# Altium PCB MAGI'sCore-NOL.PcbDoc
Units mil, origin at the board's own origin, x right, y up, seen from the top; angles counter-clockwise.
Board outline 6000 x 4000 mil, 2 copper layers (Top Layer, Bottom Layer); 18 components, 33 nets, 134 pads, 24 vias.
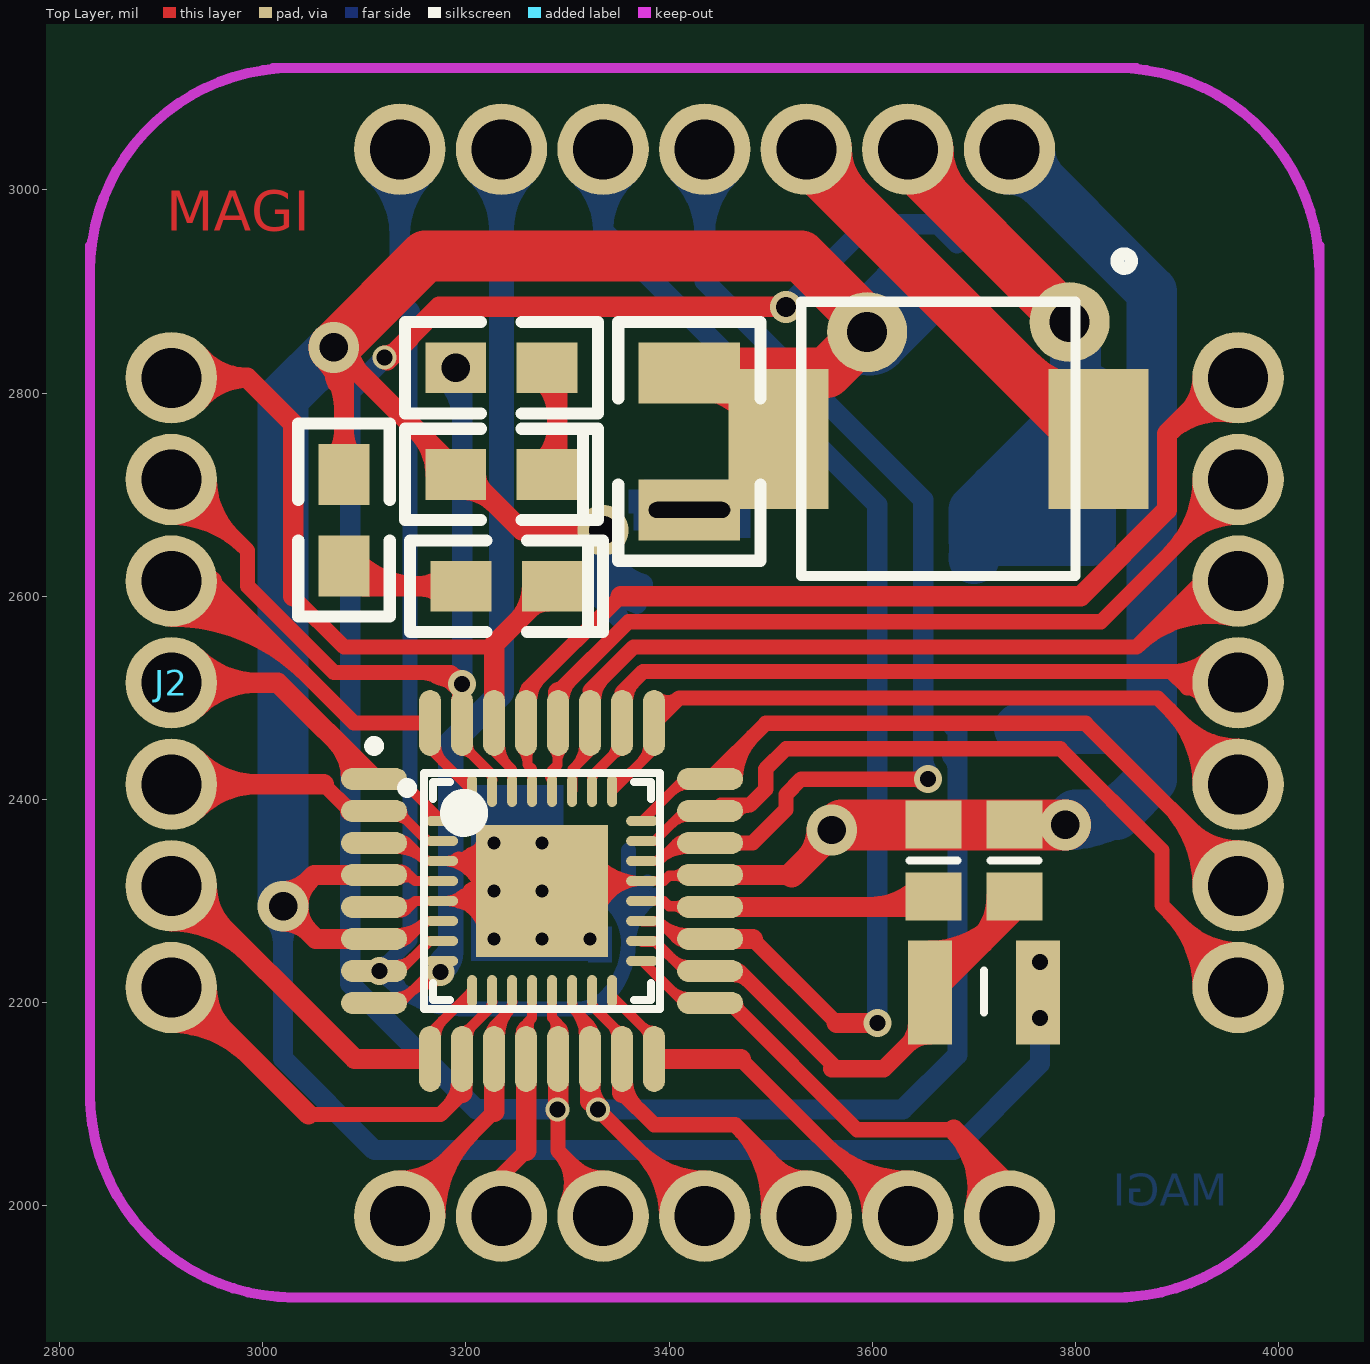
[diagram p0: Top Layer view]
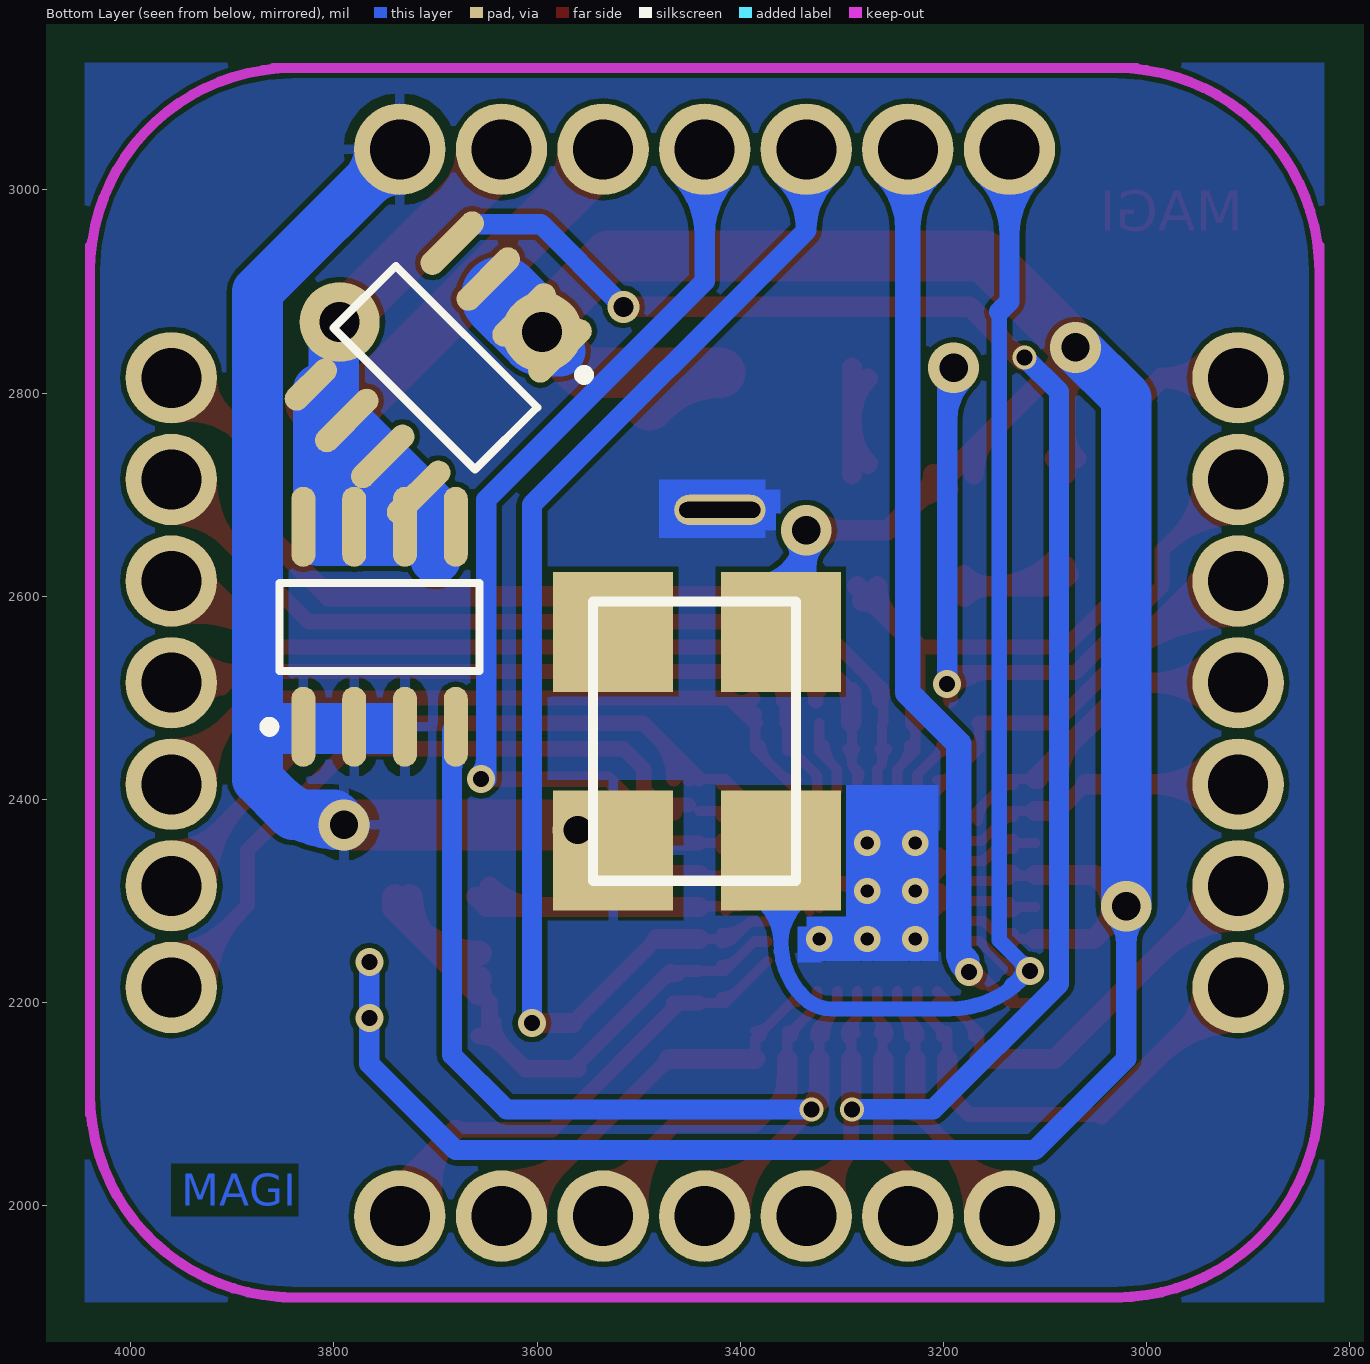
[diagram p1: Bottom Layer view, seen from below]

## Layer stack, top to bottom
Top Layer: signal copper 1.4
Dielectric: dielectric 12.6, FR-4, Dk 4.8
Bottom Layer: signal copper 1.4

## Board outline
1000,1000 7000,1000 7000,5000 1000,5000

## Design rules (kind name [scope] priority, off if disabled: settings)
Clearance [All] p1: gap=5
ComponentClearance [All] p1: gap=0 collisioncheckmode=3 verticalgap=0 showdistances=FALSE
PolygonConnect [All] p1: connectstyle=Relief reliefconductorwidth=10 reliefentries=4 polygonreliefangle="90 Angle" airgapwidth=10
RoutingVias [All] p1: holewidth=28 width=50 viastyle="Through Hole" minholewidth=28 minwidth=50 maxholewidth=28 maxwidth=50
SilkToSilkClearance [All] p1: silktosilkclearance=0
SolderMaskExpansion [All] p1: expansion=4
Width [All] p1: maxlimit=100 minlimit=10 preferedwidth=10
26 further rules are at their usual default settings.

## Components (designator, comment, footprint, x,y, rotation, side; value= is the part's Value field where it differs from the comment)
C1 "CAP_1" 1210 3420,2685 r90 top
C2 "CAP_1" 6-0805_N 3740,2340 r270 top
C3 "CAP_1" 6-0805_N 3660,2340 r270 top
J1 "CON7" CON7 3960,2215 r90 top
J2 "CON7" CON7 2910,2815 r270 top
J3 "CON7" CON7 3735,3040 r180 top
J4 "CON7" CON7 3135,1990 r0 top
L1 "INDUCTOR" 22uh 3665,2755 r0 top
L2 "INDUCTOR" 14-1210 3710,2210 r0 top
LED1 "LED_3" 0805 3195,2610 r0 top
LED2 "LED_3" 0805 3280,2825 r180 top
OSC1 "Oscillator" Oscillator 3420,2445 r270 bottom
Q1 "SI9424DY" SO-8_N#1 3700,2825 r315 bottom
Q2 "SI9426DY" SO-8_N#2 3755,2570 r90 bottom
R1 "RES1_1" 0805 3080,2630 r90 top
R2 "RES1_1" 0805 3280,2720 r180 top
U1 "ATmega8A-AU" 32A_N 3275,2310 r0 top
U2 "ATmega8A-MU" 32M1-A_N 3275,2310 r0 top

## Footprints (in the part's own frame and the unit in brackets; to place one, negate y for a bottom-side part, rotate by r counter-clockwise, add the part's x,y. Pads: shape width x height; smd on the part's side, far side on the other; paste and mask are expansions set on the pad)
6-0805_N [mm] "Chip Resistor, Body 2.0x1.2mm, IPC Medium Density"
  rect 1.2x1.4 smd: 1(-0.9,0) 2(0.9,0)
  silkscreen extent 0,-0.6 0,0.6, body extent -1.07,-0.7 1.07,0.7, height 0.7
14-1210 [mm] "Chip Resistor, Body 3.2x2.5mm, IPC High Density"
  rect 1.1x2.6 smd: 1(-1.35,0) 2(1.35,0)
  silkscreen extent 0,-0.5 0,0.55, body extent -1.68,-1.32 1.68,1.32, height 0.9
22uh [mm]
  rect 2.5x3.5 smd: 1(-4,0) 2(4,0)
  silkscreen extent -3.43,-3.43 3.43,3.43
32A_N [mm] "32-Pin Thin Quad Flat Pack 0.8 mm Pitch, IPC Medium Density"
  oval 1.65x0.55 smd: 1(-4.2,2.8) 2(-4.2,2) 3(-4.2,1.2) 4(-4.2,0.4) 5(-4.2,-0.4) 6(-4.2,-1.2) 7(-4.2,-2) 8(-4.2,-2.8) 17(4.2,-2.8) 18(4.2,-2) 19(4.2,-1.2) 20(4.2,-0.4) 21(4.2,0.4) 22(4.2,1.2) 23(4.2,2) 24(4.2,2.8)
  oval 0.55x1.65 smd: 9(-2.8,-4.2) 10(-2,-4.2) 11(-1.2,-4.2) 12(-0.4,-4.2) 13(0.4,-4.2) 14(1.2,-4.2) 15(2,-4.2) 16(2.8,-4.2) 25(2.8,4.2) 26(2,4.2) 27(1.2,4.2) 28(0.4,4.2) 29(-0.4,4.2) 30(-1.2,4.2) 31(-2,4.2) 32(-2.8,4.2)
  silkscreen extent -4.32,-2.95 2.95,3.75, body extent -3.5,-3.5 3.5,3.5, height 1.2
32M1-A_N [mm] "QFN, 32-Leads, Body 5x5mm, Pitch 0.5mm, IPC Medium Density"
  oval 0.8x0.25 smd: 1(-2.5,1.75) 2(-2.5,1.25) 3(-2.5,0.75) 4(-2.5,0.25) 5(-2.5,-0.25) 6(-2.5,-0.75) 7(-2.5,-1.25) 8(-2.5,-1.75) 17(2.5,-1.75) 18(2.5,-1.25) 19(2.5,-0.75) 20(2.5,-0.25) 21(2.5,0.25) 22(2.5,0.75) 23(2.5,1.25) 24(2.5,1.75)
  oval 0.25x0.8 smd: 9(-1.75,-2.5) 10(-1.25,-2.5) 11(-0.75,-2.5) 12(-0.25,-2.5) 13(0.25,-2.5) 14(0.75,-2.5) 15(1.25,-2.5) 16(1.75,-2.5) 25(1.75,2.5) 26(1.25,2.5) 27(0.75,2.5) 28(0.25,2.5) 29(-0.25,2.5) 30(-0.75,2.5) 31(-1.25,2.5) 32(-1.75,2.5)
  rect 3.3x3.3 smd: 33(0,0)
  silkscreen extent -3.5,-2.73 2.73,2.73, body extent -2.58,-2.58 2.58,2.58, height 1
0805 [mil]
  rect 60x50 smd: 1(0,0) 2(90,0)
  silkscreen extent -50,-45 140,45
1210 [mil]
  rect 60x100 smd: 1(0,0) 2(135,0)
  silkscreen extent -50,-70 185,70
CON7 [mil]
  round 90 hole 59.06: 1(0,0) 2(100,0) 3(200,0) 4(300,0) 5(400,0) 6(500,0) 7(600,0)
Oscillator [mil] "7mm*5mm"
  rect 118.11x118.11 smd: 1(-120,-105) 2(95,-105) 3(95,60) 4(-120,60)
  silkscreen extent -150,-125 125,75
SO-8_N#1 [mm] "SOIC, 8-Leads, Body 4.9x3.9mm, Pitch 1.27mm, IPC Medium Density"
  oval 2x0.6 smd: 1(-2.5,1.905) 2(-2.5,0.635) 3(-2.5,-0.635) 4(-2.5,-1.905) 6(2.5,-0.635) 7(2.5,0.635) 8(2.5,1.905)
  oval 1.6x0.6 smd: 5(2.5,-1.905)
  silkscreen extent -2.62,-2.5 1.1,2.88, body extent -2,-2.5 2,2.5, height 1.75
SO-8_N#2 [mm] "SOIC, 8-Leads, Body 4.9x3.9mm, Pitch 1.27mm, IPC Medium Density"
  oval 2x0.6 smd: 1(-2.5,1.905) 2(-2.5,0.635) 3(-2.5,-0.635) 4(-2.5,-1.905) 5(2.5,-1.905) 6(2.5,-0.635) 7(2.5,0.635) 8(2.5,1.905)
  silkscreen extent -2.62,-2.5 1.1,2.88, body extent -2,-2.5 2,2.5, height 1.75

## Part data
C1 C2 C3: "Capacitor"
J1 J2 J3 J4: "Connector"
Q1: "P-Channel 2.5V (G-S)  MOSFET"
Q2: "N-Channel 2.5V (G-S) Rated  MOSFET"
U1: "8-bit AVR Microcontroller, 8KB Flash, 512 Bytes EEPROM, 1KB SRAM, 32-pin TQFP, Industrial Grade (-40癈 to 85癈)"
U2: "8-bit AVR Microcontroller, 8KB Flash, 512 Bytes EEPROM, 1KB SRAM, 33-pin MLF, Industrial Grade (-40癈 to 85癈)"

## Free pads (board coordinates)
  round 78.74 hole 39.37: 0(3794.19,2870) 1(3595,2860)
  oval 90x30 hole 15.75 slot 80 at 0 deg: 1(3420,2685)

## Via types
v1: diameter 25.98, hole 12.99, Top Layer to Bottom Layer, tented top, 7 vias
v2: diameter 27.56, hole 15.75, Top Layer to Bottom Layer, 7 vias
v3: diameter 50, hole 28, Top Layer to Bottom Layer, 6 vias
v4: diameter 23.62, hole 15.75, Top Layer to Bottom Layer, 3 vias
v5: diameter 31.5, hole 19.68, Top Layer to Bottom Layer, 1 vias

## Nets (pads, with @x,y where several pads share a name; then routed paths per layer and width w, separated by ;. In a path a pad name is that pad's centre, name@x,y a point inside that pad or via, vN(x,y) a via of type N, cw(c..) or ccw(c..) an arc to the next point about the centre after c; other vN are vias at no path point)
ADC6: J3.5 U1.19 U2.19 | length 1437.8
  Top Layer w10: U2.19 3373.9,2280 3390,2280 ; U2.19@3384.25,2280.55 cw(c3384.25,2268.01) 3393.12,2276.88 ; 3406.49,2263.51 ccw(c3418.39,2275.4) U1.19@3418.8,2258.58 ; U1.19@3413.99,2259.32 ccw(c3407.24,2254.41) 3407.24,2262.76 ; U1.19@3413.99,2266.19 cw(c3407.24,2271.1) 3407.24,2262.76 ; U1.19@3418.56,2268.58 cw(c3417.6,2307.59) 3390,2280 ; U1.19 3407.24,2262.76 ; 3390,2280 3407.24,2262.76
  Top Layer w15: 3482.24,2262.76 3565,2180
  Top Layer w20: U1.19 3482.24,2262.76 ; 3565,2180 v2(3605,2180)
  Bottom Layer w20: J3.5@3311.25,3014.29 cw(c3261.08,2960) 3335,2960 ; J3.5 3335,2960 ; J3.5@3358.75,3014.29 ccw(c3408.92,2960) 3335,2960 ; v2(3605,2180) 3605,2690 3335,2960
ADC7: J3.4 U1.22 U2.22 | length 1325.8
  Top Layer w10: U2.22 3389.53,2339.53 ; U2.22@3384.25,2339.45 ccw(c3384.25,2352) 3393.13,2343.13 ; 3406.36,2356.36 cw(c3418.57,2344.15) U1.22@3418.74,2361.42 ; U1.22@3413.99,2353.81 ccw(c3407.24,2348.9) 3407.24,2357.24 ; U1.22@3413.99,2360.68 cw(c3407.24,2365.59) 3407.24,2357.24 ; U1.22@3418.64,2351.42 ccw(c3418.23,2310.82) 3389.53,2339.53 ; U1.22 3407.24,2357.24 ; 3389.53,2339.53 3407.24,2357.24
  Top Layer w15: U1.22 3482.24,2357.24 3515,2390 3515,2405 3530,2420 v2(3655,2420) ; 3639.84,2420 cw(c3639.84,2404.84) 3650.56,2415.56 ccw(c3639.84,2404.84) 3639.84,2420 ; 3639.84,2420 ccw(c3639.84,2435.16) 3650.56,2424.44 cw(c3639.84,2435.16) 3639.84,2420
  Bottom Layer w20: J3.4@3410.25,3015.25 cw(c3350.5,2955.5) 3435,2955.5 cw(c3519.5,2955.5) J3.4@3459.75,3015.25 ; J3.4 3435,2910 3650,2695 v2@3650,2420 ; 3650,2441.2 ccw(c3676.2,2441.2) 3657.67,2422.67 cw(c3676.2,2441.2) 3650,2441.2
GND: C1.1 C2.1 C3.1 J3.1 OSC1.2 pad.1@3420,2685 Q2.1 Q2.2 Q2.3 U1.3 U1.5 U1.21 U2.3 U2.5 U2.21 U2.33 | length 4473.8
  Top Layer w10: U1.5 3144.25,2294.25 ; U1.3 3142.76,2357.24 ; U1.5@3128.84,2290.88 ccw(c3134.77,2299.02) 3141.9,2291.9 ; U1.3@3131.26,2361.42 cw(c3131.43,2344.15) 3143.64,2356.36 ; U1.3@3131.36,2351.42 cw(c3131.77,2310.82) 3160.47,2339.53 ; U1.5@3134.73,2298.96 ccw(c3141.75,2308.57) 3150.16,2300.16 ; U1.5@3135.66,2290.39 cw(c3144.25,2282.77) 3144.25,2294.25 ; U1.5@3135.66,2298.12 ccw(c3144.25,2305.73) 3144.25,2294.25 ; U1.3@3136.01,2353.81 cw(c3142.76,2348.9) 3142.76,2357.24 ; U1.3@3136.01,2360.68 ccw(c3142.76,2365.59) 3142.76,2357.24 ; 3156.87,2343.13 ccw(c3165.75,2352) U2.3@3165.75,2339.45 ; U2.3@3187.33,2339.57 cw(c3195.45,2334.88) 3193.03,2343.94 ; U2.3@3187.58,2339.53 cw(c3187.58,2301.67) U2.33@3225.26,2305.26 ; U2.5@3190.68,2300.16 ccw(c3190.68,2339.55) U2.33@3227.85,2326.52 ; 3194.01,2304.79 cw(c3207.8,2288.39) U2.33@3222.33,2304.13 ; 3195.87,2302.66 cw(c3210.23,2272.83) U2.33@3224.35,2302.77 ; 3196.22,2300.16 cw(c3196.22,2252.7) U2.33@3234.6,2280.62 ; 3198.57,2339.53 cw(c3198.57,2302.72) U2.33@3235.22,2306.21 ; 3200.12,2345.23 cw(c3216.79,2324.16) U2.33@3225.24,2349.66 ; 3201.53,2339.53 ccw(c3201.53,2383.47) U2.33@3232.6,2352.4 ; 3202.25,2304.19 cw(c3212.12,2287.09) U2.33@3223.25,2303.4 ; 3202.36,2294.5 cw(c3171.81,2257.18) U2.33@3219.8,2261.96 ; 3202.7,2312.09 cw(c3215.56,2296.79) U2.33@3229.12,2311.48 ; 3204.78,2300.16 ccw(c3204.78,2334.61) U2.33@3237.29,2323.22 ; 3208.41,2322.83 ccw(c3229.94,2330.86) U2.33@3227.55,2308 ; 3208.7,2301.73 ccw(c3200.76,2321.58) U2.33@3220.41,2313.15 ; 3209.57,2339.53 cw(c3209.57,2303.77) U2.33@3245.17,2307.16 ; 3209.59,2339.12 ccw(c3199.42,2356.74) U2.33@3219.77,2357.1 ; U2.33@3211.39,2319.39 cw(c3223.32,2305.2) U2.33@3235.9,2318.82 ; U2.33@3211.44,2302.82 cw(c3217.82,2286.84) U2.33@3224.61,2302.66 ; U2.33@3212.37,2342.6 ccw(c3200.26,2357.9) U2.33@3219.77,2357.44 ; U2.33@3214.04,2307.71 ccw(c3228.06,2312.94) U2.33@3226.51,2298.06 ; U2.33@3214.66,2356.73 cw(c3223.77,2345.22) U2.33@3228.39,2359.15 ; U2.33@3214.77,2311.76 cw(c3221.75,2297.27) U2.33@3228.61,2311.82 ; U2.33@3215.32,2300.58 ccw(c3210.79,2308.41) U2.33@3219.8,2309.26 ; U2.33@3215.31,2304.31 ccw(c3176.58,2300.62) U2.3 ; U2.33@3216.07,2301.02 cw(c3222.41,2290.04) U2.33@3225.69,2302.28 ; U2.33@3216.81,2327.94 ccw(c3231.58,2333.45) U2.33@3229.04,2317.89 ; U2.33@3217.5,2346.66 cw(c3225.36,2336.72) U2.33@3226.83,2349.31 ; U2.33@3218.41,2329.83 cw(c3176.58,2344.49) U2.5 cw(c3176.58,2238.42) U2.33@3226.51,2274.73 ; U2.33@3219.81,2335.62 cw(c3206.69,2315.72) U2.33@3229.69,2309.47 ; U2.33@3221.04,2279.21 cw(c3205.78,2260.57) U2.33@3229.75,2262.96 ; U2.33@3226.54,2321.95 cw(c3228.23,2305.38) U2.33@3244.05,2310.58 ; U2.33@3227.58,2317.99 ccw(c3227.31,2330.11) 3237.49,2323.53 ccw(c3250.04,2315.42) U2.33@3235.52,2311.89 ; U2.33@3231.34,2328.02 cw(c3220.73,2311.91) U2.33@3239.34,2306.85 ; U2.33@3232.83,2303.82 cw(c3241.09,2293.76) U2.33@3248.75,2304.3 ; U2.33@3249.5,2304.19 cw(c3259.37,2287.09) U2.33@3270.49,2303.4 ; U2.33@3262.56,2300.58 ccw(c3258.04,2308.41) U2.33@3267.04,2309.26 ; U2.33@3263.32,2301.02 cw(c3269.65,2290.04) U2.33@3272.93,2302.28 ; U2.33@3277.07,2317.72 ccw(c3280.35,2329.96) U2.33@3286.68,2318.99 ; U2.33@3279.51,2316.6 ccw(c3290.63,2332.91) U2.33@3300.5,2315.81 ; U2.33@3282.96,2310.75 cw(c3291.96,2311.59) U2.33@3287.44,2319.42 ; U2.33@3312.71,2296.79 cw(c3345.22,2285.4) 3345.22,2319.84 ; U2.33@3315.4,2339.39 ccw(c3353.78,2367.3) 3353.78,2319.84 ; U2.33@3322.15,2293.48 cw(c3359.32,2280.46) U2.21@3359.32,2319.84 ; U2.33@3323.49,2345.27 ccw(c3373.42,2381.58) U2.21 ccw(c3373.42,2275.51) U2.33@3331.59,2290.17 ; 3402.83,2325 ccw(c3402.83,2341.62) U1.21@3414.58,2329.87 ; 3406.44,2325 cw(c3406.44,2313.49) U1.21@3414.58,2321.63 ; U1.21 3439.61,2325 3400,2325 3394.84,2319.84 U2.21 U2.33@3284.84,2319.84 ; 3142.76,2357.24 3160.47,2339.53 ; 3144.25,2294.25 3150.16,2300.16 ; 3150.16,2300.16 U2.5 U2.33@3265.16,2300.16 ; 3160.47,2339.53 U2.3 3245.47,2339.53 v1(3275,2310) ; U2.3 ccw(c3176.58,2395.33) 3221.34,2362.02 cw(c3176.58,2395.33) U2.3 ; U2.33@3261.36,2323.64 cw(c3247.71,2310) 3267.01,2310 ccw(c3247.71,2310) U2.33@3261.36,2323.64 ; U2.33@3261.36,2323.64 ccw(c3275,2337.29) 3275,2317.99 cw(c3275,2337.29) U2.33@3261.36,2323.64 ; U2.33@3265.16,2300.16 cw(c3270.9,2294.41) 3272.97,2302.27 ccw(c3270.9,2294.41) U2.33@3265.16,2300.16 ; U2.33@3265.16,2300.16 ccw(c3259.41,2305.9) 3267.27,2307.97 cw(c3259.41,2305.9) U2.33@3265.16,2300.16 ; U2.33@3265.16,2300.16 cw(c3265.16,2340.3) 3233.97,2315.03 ccw(c3265.16,2340.3) U2.33@3265.16,2300.16 ; U2.33@3265.16,2300.16 v1(3275,2310) ; v1(3275,2310) U2.33@3284.84,2319.84 ; U2.33@3284.84,2319.84 cw(c3279.1,2325.59) 3277.03,2317.73 ccw(c3279.1,2325.59) U2.33@3284.84,2319.84 ; U2.33@3284.84,2319.84 ccw(c3290.59,2314.1) 3282.73,2312.03 cw(c3290.59,2314.1) U2.33@3284.84,2319.84 ; U2.5@3184.7,2300.16 ccw(c3184.7,2353.06) 3222.1,2315.65 cw(c3184.7,2353.06) U2.5@3184.7,2300.16 ; 3196.48,2339.53 ccw(c3196.48,2380.52) 3229.37,2356.05 cw(c3196.48,2380.52) 3196.48,2339.53 ; 3208.84,2300.16 ccw(c3208.84,2328.92) 3229.18,2308.58 cw(c3208.84,2328.92) 3208.84,2300.16 ; U2.33@3216.39,2339.53 ccw(c3216.39,2365.7) 3237.39,2350.08 cw(c3216.39,2365.7) U2.33@3216.39,2339.53 ; U2.33@3226.2,2308.74 ccw(c3244.19,2323.31) 3244.19,2300.16 cw(c3244.19,2323.31) U2.33@3226.2,2308.74 ; U2.33@3231.94,2300.16 ccw(c3231.94,2353.06) 3269.35,2315.65 cw(c3231.94,2353.06) U2.33@3231.94,2300.16 ; U2.33@3256.09,2300.16 ccw(c3256.09,2328.92) 3276.42,2308.58 cw(c3256.09,2328.92) U2.33@3256.09,2300.16 ; U2.33@3273.58,2311.42 cw(c3293.91,2291.09) 3293.91,2319.84 ccw(c3293.91,2291.09) U2.33@3273.58,2311.42 ; U2.33@3280.65,2304.35 cw(c3318.06,2266.94) 3318.06,2319.84 ccw(c3318.06,2266.94) U2.33@3280.65,2304.35
  Top Layer w20: U1.21 3520.75,2325.75
  Top Layer w25: 3520.75,2325.75 v3@3565,2370 ; 3535.13,2340.13 ccw(c3505.25,2370) 3547.5,2370 cw(c3505.25,2370) 3535.13,2340.13
  Top Layer w30: v3@3565,2370 v3@3570,2375
  Top Layer w50: v3@3570,2375 v3(3790,2375)
  Bottom Layer w50: J3.1@3735,3020 cw(c3735,2971.72) 3769.14,3005.86 cw(c3803.28,3040) J3.1@3755,3040 ; J3.1 3875,2900 3875,2470 ; 3745,2470 3875,2470 ; v3(3790,2375) ccw(c3790,2471.57) 3858.28,2403.28 cw(c3790,2471.57) v3(3790,2375) ; v3(3790,2375) 3800,2385 3840,2385 3875,2420 3875,2470
  other v1: 3227.76,2262.76 3275,2262.76 3322.24,2262.76 3227.76,2310 3227.76,2357.25 3275,2357.25
  other v3: 3560,2370
MISO: J4.6 U1.16 U2.16 | length 633.8
  Top Layer w10: U2.16@3343.9,2200.83 cw(c3343.9,2188.09) 3352.9,2197.1 ; U2.16 3343.9,2206.1 3385.24,2164.76 U1.16 ; 3372.67,2177.33 ccw(c3385.24,2189.9) U1.16@3385.24,2172.13 ; 3376.38,2173.62 cw(c3369.05,2166.3) U1.16@3379.41,2166.3
  Top Layer w15: 3470.35,2144.65 J4.6@3625,1990 ; 3553.91,2061.09 ccw(c3635,2142.18) J4.6@3635,2027.5 ; 3578.05,2036.95 cw(c3531.11,1990) J4.6@3597.5,1990 ; 3579.52,2035.48 ccw(c3635,2090.96) J4.6@3635,2012.5
  Top Layer w20: U1.16 3470.35,2144.65 ; J4.6@3625,1990 J4.6
MOSI: J4.5 U1.15 U2.15 | length 661.7
  Top Layer w10: U2.15@3324.13,2200.75 ccw(c3332.99,2200.75) 3326.73,2194.48 ; U2.15 3324.21,2197 3353.74,2167.47 U1.15 ; 3342.96,2178.25 cw(c3331.01,2166.3) U1.15@3347.91,2166.3 ; 3345.8,2175.42 ccw(c3353.74,2183.36) U1.15@3353.74,2172.13
  Top Layer w15: 3353.74,2111.26 3385,2080 3465,2080 ; U1.15@3357.07,2122.99 ccw(c3393.42,2122.99) 3367.72,2097.28 ; 3488.24,2056.76 cw(c3429.02,1997.54) J4.5@3512.56,1991.6 ; J4.5@3497.59,1992.66 ccw(c3385.64,2000.63) 3465,2080 ; 3505.13,2039.87 ccw(c3535,2069.75) J4.5@3535,2027.5 ; 3511.47,2033.52 cw(c3472.41,1994.45) J4.5@3527.52,1990.53 ; J4.5@3535,2010 3465,2080
  Top Layer w20: 3353.74,2111.26 U1.15 ; J4.5 J4.5@3535,2010
NetC2_2: C2.2 L2.1 U1.18 U2.18 | length 765
  Top Layer w10: U2.18@3373.43,2260 U2.18@3386.46,2260 ; U2.18 3385.67,2260.79 U2.18@3386.46,2260 ; 3402.77,2243.68 ccw(c3418.7,2259.61) U1.18@3418.7,2237.09 ; U1.18 3415.2,2231.26 U2.18@3386.46,2260
  Top Layer w12: U1.18 U1.18@3468.74,2231.26
  Top Layer w15: U1.18@3462.01,2227.93 cw(c3462.01,2203.65) 3479.18,2220.82 ; U1.18@3468.74,2231.26 3560,2140 3560,2135
  Top Layer w17: 3560,2135 3611.38,2135 3646.85,2170.47 3646.85,2200 L2.1 ; L2.1@3643.7,2180.47 cw(c3611.94,2180.47) 3634.4,2158.02 cw(c3656.85,2135.56) L2.1@3656.85,2167.32
  Top Layer w25: L2.1 3740,2293.15 C2.2 ; L2.1@3656.85,2223.68 ccw(c3656.85,2256.71) 3680.21,2233.36 ; L2.1@3656.85,2248.68 ccw(c3656.85,2342.07) 3722.88,2276.03 ; 3706.22,2259.37 ccw(c3661.02,2304.57) C2.2@3724.94,2304.57
NetC3_2: C3.2 U1.20 U2.20 | length 368.9
  Top Layer w10: U2.20 3394.84,2300.16 3400,2295 3439.61,2295 U1.20 ; 3402.83,2295 cw(c3402.83,2278.38) U1.20@3414.58,2290.13 ; 3406.44,2295 ccw(c3406.44,2306.51) U1.20@3414.58,2298.37
  Top Layer w20: U1.20 3649.69,2294.25 C3.2 ; 3598.27,2294.25 ccw(c3598.27,2362.36) C3.2@3646.43,2314.2
NetJ1_1: J1.1 U1.23 U2.23 | length 1017.7
  Top Layer w10: U2.23 3385.67,2359.21 3415.2,2388.74 U1.23 ; 3402.77,2376.31 cw(c3418.7,2360.38) U1.23@3418.7,2382.91
  Top Layer w15: U1.23@3451.02,2394.57 3479.57,2394.57 ; U1.23@3464.73,2386.84 cw(c3479.57,2376.48) 3479.57,2394.57 ; 3891.78,2289.17 cw(c3817.61,2215) J1.1@3922.5,2215 ; 3906.13,2274.81 ccw(c3960,2328.68) J1.1@3960,2252.5 ; 3917.39,2263.56 cw(c3868.82,2215) J1.1@3937.5,2215 ; J1.1@3975,2190 3975,2205.95 3885,2295.95 3885,2350 3785,2450 3515,2450 3495,2430 3495,2410 3479.57,2394.57
NetJ1_2: J1.2 U1.24 U2.24 | length 1018.4
  Top Layer w10: U2.24 3414.76,2420.24 U1.24 ; 3402.03,2407.5 cw(c3418.7,2390.84) U1.24@3418.7,2414.41
  Top Layer w15: U1.24 3495.12,2475 3810,2475 3975,2310 J1.2@3975,2290 ; U1.24@3450.33,2420.24 cw(c3474.43,2420.24) 3457.39,2437.27 ; U1.24@3465.33,2420.24 cw(c3525.64,2420.24) 3483,2462.88 ; 3888.91,2396.09 cw(c3807.82,2315) J1.2@3922.5,2315 ; 3913.05,2371.95 ccw(c3960,2418.89) J1.2@3960,2352.5 ; 3914.52,2370.48 cw(c3859.04,2315) J1.2@3937.5,2315
NetJ1_3: J1.3 U1.25 U2.25 | length 1013.9
  Top Layer w10: U2.25 3385.24,2449.76 U1.25 ; U2.25@3343.9,2409.17 ccw(c3343.9,2410.98) U2.25@3345.17,2409.7 ; U2.25@3343.9,2419.17 ccw(c3343.9,2445.12) 3362.25,2426.77 ; 3372.51,2437.03 ccw(c3355.84,2453.7) U1.25@3379.41,2453.7
  Top Layer w15: U1.25 3409.88,2500 ; U1.25@3386.19,2484.43 ccw(c3387.81,2499.83) 3398.76,2488.88 ; U1.25@3387.47,2499.47 ccw(c3398.4,2511.48) 3409.88,2500 ; 3891.78,2489.17 cw(c3817.61,2415) J1.3@3922.5,2415 ; 3906.13,2474.81 ccw(c3960,2528.68) J1.3@3960,2452.5 ; 3917.39,2463.56 cw(c3868.82,2415) J1.3@3937.5,2415 ; J1.3@3975,2390 3975,2405.95 3880.95,2500 3409.88,2500
NetJ1_4: J1.4 U1.26 U2.26 | length 966.3
  Top Layer w10: U2.26@3324.13,2419.25 cw(c3333.54,2419.25) 3326.89,2425.91 ; U2.26 3324.21,2423.23 3353.74,2452.76 U1.26 ; 3343.13,2442.14 ccw(c3331.57,2453.7) U1.26@3347.91,2453.7 ; 3345.4,2444.42 cw(c3353.74,2436.08) U1.26@3353.74,2447.87
  Top Layer w15: U1.26 3353.74,2505.43 3374.21,2525.91 3894.09,2525.91 ; U1.26@3357.07,2497.01 cw(c3385.44,2497.01) 3365.38,2517.07 ; 3895.8,2525.91 ccw(c3895.8,2579.2) J1.4@3933.48,2541.52 ; 3914.52,2525.91 cw(c3914.52,2500.74) J1.4@3938.53,2508.27 ; J1.4@3922.99,2521.04 cw(c3910,2523.16) 3910,2510 ; J1.4@3924.22,2503.78 ccw(c3894.1,2494.34) 3894.1,2525.91 ; J1.4@3925.73,2499.78 ccw(c3910,2492.79) 3910,2510 ; J1.4@3930.91,2525.91 3894.09,2525.91 ; J1.4@3955,2510 3910,2510 ; 3894.09,2525.91 3910,2510
NetJ1_5: J1.5 U1.27 U2.27 | length 1078.4
  Top Layer w10: U2.27 3305,2408.9 3305,2430 3322.24,2447.24 U1.27 ; 3307.73,2432.73 ccw(c3286.76,2453.7) U1.27@3316.42,2453.7
  Top Layer w15: U1.27@3322.24,2507.24 3365,2550 3860,2550 ; U1.27@3325.57,2497.01 cw(c3358.31,2497.01) 3335.16,2520.16 ; 3879.88,2569.88 cw(c3939.36,2510.41) J1.5@3955.64,2592.93 ; 3899.76,2589.76 cw(c3945.91,2543.61) J1.5@3958.55,2607.64 ; J1.5@3925,2615 3860,2550 ; J1.5@3952.74,2578.21 ccw(c3932.8,2477.2) 3860,2550
  Top Layer w20: J1.5@3925,2615 3950,2615 J1.5@3975,2590
NetJ1_6: J1.6 U1.28 U2.28 | length 1159.8
  Top Layer w10: U2.28@3284.76,2419.24 cw(c3302.88,2421.14) 3290,2434.02 ; U2.28@3284.79,2419.2 cw(c3289.7,2424) 3284.84,2428.86 ; U2.28 3284.84,2428.86 ; U1.28@3286.63,2449.58 cw(c3278.49,2441.44) 3290,2441.44 ; 3290,2437.83 cw(c3306.62,2437.83) U1.28@3294.87,2449.58 ; U1.28 3290,2474.61 3290,2434.02 ; 3284.84,2428.86 3290,2434.02
  Top Layer w15: U1.28@3290.75,2505.75 3360,2575 3825,2575 J1.6@3940,2690 ; U1.28@3294.07,2497.01 cw(c3323.21,2497.01) 3302.61,2517.61 ; 3892.45,2642.45 ccw(c3819.9,2715) J1.6@3922.5,2715 ; 3904.52,2654.52 cw(c3960,2599.04) J1.6@3960,2677.5 ; 3918.05,2668.05 ccw(c3871.11,2715) J1.6@3937.5,2715 ; 3930.13,2680.13 cw(c3960,2650.25) J1.6@3960,2692.5
  Top Layer w20: U1.28 U1.28@3290.75,2505.75 ; J1.6@3940,2690 J1.6@3975,2690
NetJ2_3: J2.3 U1.32 U2.32 | length 844.1
  Top Layer w10: U1.32 3164.76,2449.76 U2.32 ; U1.32@3170.59,2453.7 ccw(c3194.16,2453.7) 3177.49,2437.03 ; 3187.75,2426.77 ccw(c3206.1,2445.12) U2.32@3206.1,2419.17 ; U2.32@3204.83,2409.7 ccw(c3206.1,2410.98) U2.32@3206.1,2409.17
  Top Layer w15: J2.3@2910,2577.5 cw(c2910,2390.4) 3042.3,2522.7 ; J2.3@2910,2592.5 cw(c2910,2441.61) 3016.69,2548.31 ; J2.3@2910,2607.5 cw(c2910,2492.82) 2991.09,2573.91 ; J2.3@2910,2622.5 cw(c2910,2544.04) 2965.48,2599.52 ; J2.3@2950,2615 3089.65,2475.35 U1.32
  Top Layer w20: J2.3@2920,2615 J2.3@2950,2615
NetJ2_4: J2.4 U1.1 U2.1 | length 533.3
  Top Layer w10: U1.1 3135.24,2420.24 U2.1 ; U1.1@3131.3,2414.41 cw(c3131.3,2390.84) 3147.97,2407.5 ; 3158.23,2397.25 cw(c3139.88,2378.9) U2.1@3165.83,2378.9 ; U2.1@3175.3,2380.18 cw(c3174.02,2378.9) U2.1@3175.83,2378.9
  Top Layer w20: J2.4@2920,2515 3014.88,2515 U1.1 ; J2.4@2934.75,2490.25 cw(c2994.5,2430.5) 2994.5,2515 cw(c2994.5,2599.5) J2.4@2934.75,2539.75 ; 3071.27,2458.61 cw(c3032.89,2420.24) U1.1@3087.17,2420.24 ; U1.1@3105.41,2424.47 cw(c3101.18,2420.24) U1.1@3107.17,2420.24
NetJ2_5: J2.5 U1.2 U2.2 | length 461.1
  Top Layer w10: U1.2 3132.47,2388.74 3162,2359.21 U2.2 ; U1.2@3131.3,2382.91 cw(c3131.3,2366.01) 3143.25,2377.96 ; U1.2@3137.13,2388.74 ccw(c3148.36,2388.74) 3140.42,2380.8 ; 3159.48,2361.73 ccw(c3165.75,2367.99) U2.2@3165.75,2359.13
  Top Layer w15: 3060,2415 U1.2@3086.26,2388.74 ; 3079.36,2395.64 ccw(c3087.99,2404.28) U1.2@3087.99,2392.07
  Top Layer w20: J2.5 3060,2415 ; J2.5@2934.75,2390.25 cw(c2994.5,2330.5) 2994.5,2415 cw(c2994.5,2499.5) J2.5@2934.75,2439.75 ; U1.2@3086.26,2388.74 U1.2
NetJ2_6: J2.6 U1.9 U2.9 | length 619.8
  Top Layer w10: U1.9 3164.76,2170.24 U2.9 ; U1.9@3170.59,2166.3 cw(c3194.16,2166.3) 3177.5,2182.97 ; 3187.75,2193.23 cw(c3206.1,2174.88) U2.9@3206.1,2200.83 ; U2.9@3204.83,2210.3 cw(c3206.1,2209.02) U2.9@3206.1,2210.83
  Top Layer w20: J2.6@2910,2280 cw(c2910,2171.36) 2986.82,2248.18 ; J2.6@2910,2300 cw(c2910,2239.64) 2952.68,2282.32 ; J2.6@2920,2315 3090.35,2144.65 U1.9 ; J2.6@2945,2315 ccw(c3005.36,2315) 2962.68,2272.32
NetJ2_7: J2.7 U1.10 U2.10 | length 687.1
  Top Layer w10: U1.10 3196.26,2167.47 3225.79,2197 U2.10 ; U1.10@3196.26,2172.13 ccw(c3196.26,2183.36) 3204.2,2175.42 ; U1.10@3202.09,2166.3 cw(c3218.99,2166.3) 3207.04,2178.25 ; 3223.27,2194.48 ccw(c3217.01,2200.75) U2.10@3225.87,2200.75
  Top Layer w15: 3045,2090 3175,2090 3196.26,2111.26 ; 3182.28,2097.28 ccw(c3156.58,2122.99) U1.10@3192.93,2122.99
  Top Layer w20: J2.7@2910,2180 cw(c2910,2071.36) 2986.82,2148.18 ; J2.7@2910,2200 cw(c2910,2139.64) 2952.68,2182.32 ; J2.7@2920,2215 3045,2090 ; J2.7@2945,2215 ccw(c3005.36,2215) 2962.68,2172.32 ; 3196.26,2111.26 U1.10
NetJ4_1: J4.1 U1.11 U2.11 | length 542.8
  Top Layer w10: U1.11@3223.58,2166.26 cw(c3240.85,2166.43) 3228.64,2178.64 ; U1.11@3224.32,2171.01 ccw(c3219.41,2177.76) 3227.76,2177.76 ; U1.11 3227.76,2177.76 ; U1.11@3231.19,2171.01 cw(c3236.1,2177.76) 3227.76,2177.76 ; U1.11@3233.58,2166.36 cw(c3274.18,2166.76) 3245.47,2195.47 ; 3241.88,2191.88 ccw(c3233,2200.75) U2.11@3245.55,2200.75 ; U2.11 3245.47,2195.47 ; 3227.76,2177.76 3245.47,2195.47
  Top Layer w15: J4.1@3135,2000 3227.76,2092.76 ; J4.1@3135,2027.5 ccw(c3135,2093.89) 3181.95,2046.95 ; J4.1@3157.5,1990 cw(c3235.96,1990) 3180.48,2045.48 ; J4.1@3172.5,1990 cw(c3287.18,1990) 3206.09,2071.09
  Top Layer w20: J4.1 J4.1@3135,2000 ; 3227.76,2092.76 U1.11
NetJ4_2: J4.2 U1.12 U2.12 | length 283.6
  Top Layer w10: U1.12@3255.61,2170.85 ccw(c3248.27,2180) 3260,2180 ; U1.12@3255.88,2163.84 cw(c3264.01,2169.77) 3256.89,2176.89 ; U1.12@3260,2145.39 3260,2180 ; 3260,2178.56 ccw(c3271.51,2178.56) U1.12@3263.37,2170.42 ; U1.12@3263.96,2169.73 cw(c3273.57,2176.75) 3265.16,2185.16 ; U2.12 3265.16,2185.16 ; 3260,2180 3265.16,2185.16
  Top Layer w15: J4.2 3235,2030 3259.25,2054.25
  Top Layer w20: 3259.25,2054.25 U1.12
NetLED1_1: LED1.1 R1.1 | length 279.6
  Top Layer w20: R1.1@3076.46,2621.46 ccw(c3104.14,2649.14) R1.1@3104.14,2610 ; R1.1 3100,2610 LED1.1 ; R1.1@3090.61,2635.61 ccw(c3152.43,2697.43) 3152.43,2610 ; LED1.1@3179.39,2599.39 ccw(c3153.79,2573.79) 3153.79,2610 ccw(c3153.79,2646.21) LED1.1@3179.39,2620.61
NetLED2_1: LED2.1 R2.1 | length 188.7
  Top Layer w20: R2.1@3274.39,2730.61 ccw(c3236.72,2768.28) 3290,2768.28 ; LED2.1@3274.39,2814.39 cw(c3236.72,2776.72) 3290,2776.72 ; R2.1@3290,2720 LED2.1@3290,2825
OC1A: J4.3 Q1.4 U1.13 U2.13 | length 1976.7
  Top Layer w10: U2.13 3284.84,2185.16 ; U1.13@3286.04,2169.73 ccw(c3276.43,2176.75) 3284.84,2185.16 ; U1.13@3286.88,2170.66 ccw(c3279.27,2179.25) 3290.75,2179.25 ; U1.13 3290.75,2179.25 ; 3293.11,2176.89 cw(c3285.99,2169.77) U1.13@3294.12,2163.84 ; U1.13@3294.61,2170.66 cw(c3302.23,2179.25) 3290.75,2179.25 ; 3284.84,2185.16 3290.75,2179.25
  Top Layer w15: v4@3290.75,2095 3290.75,2054.25 ; J4.3@3300.45,2004.59 ccw(c3258.71,2022.21) 3290.75,2054.25 ; 3305.13,2039.87 ccw(c3335,2069.75) J4.3@3335,2027.5 ; 3306.51,2038.49 cw(c3280.87,2012.85) J4.3@3314.27,1998.75 ; J4.3 3335,2010 3290.75,2054.25 ; v4@3286.95,2091.95 cw(c3277.79,2082.79) 3290.75,2082.79 ccw(c3277.79,2082.79) v4@3286.95,2091.95
  Top Layer w20: v4@3122.5,2832.5 3145,2855 3145,2856.21 3173.79,2885 v5(3515,2885) ; v4@3290.75,2095 U1.13 ; v4@3120,2836.81 ccw(c3120,2853.25) 3131.63,2841.63 cw(c3120,2853.25) v4@3120,2836.81
  Bottom Layer w20: v4(3120,2835) 3086.22,2801.22 3086.22,2218.78 3210,2095 v4(3290,2095) ; v5@3515,2890 3520,2890 3596.07,2966.07 3665,2966.07 Q1.4
OC1B: J4.4 Q2.4 U1.14 U2.14 | length 1336.9
  Top Layer w10: U2.14@3304.45,2200.75 ccw(c3317,2200.75) 3308.12,2191.88 ; U2.14 3304.53,2195.47 ; U1.14@3316.42,2166.36 ccw(c3275.82,2166.76) 3304.53,2195.47 ; U1.14@3318.81,2171.01 ccw(c3313.9,2177.76) 3322.24,2177.76 ; 3321.36,2178.64 cw(c3309.15,2166.43) U1.14@3326.42,2166.26 ; U1.14 3322.24,2177.76 ; U1.14@3325.68,2171.01 cw(c3330.59,2177.76) 3322.24,2177.76 ; 3304.53,2195.47 3322.24,2177.76
  Top Layer w15: v4@3322.24,2102.76 v4(3330,2095) J4.4 ; J4.4@3397.5,1990 ccw(c3306.97,1990) 3370.98,2054.02 ccw(c3435,2118.03) J4.4@3435,2027.5 ; J4.4@3412.5,1990 ccw(c3358.18,1990) 3396.59,2028.41 ccw(c3435,2066.82) J4.4@3435,2012.5
  Top Layer w20: v4@3322.24,2102.76 U1.14 ; U1.14@3322.24,2118.1 ccw(c3353.1,2118.1) 3331.28,2096.28 cw(c3353.1,2118.1) U1.14@3322.24,2118.1
  Bottom Layer w19.68: v4(3330,2095) 3630,2095 3683.62,2148.62 3683.62,2467.95 Q2.4 ; Q2.4@3678.61,2442.62 cw(c3666.5,2430.52) 3683.62,2430.52
PB6: J3.7 OSC1.3 U1.7 U2.7 | length 1780.4
  Top Layer w10: U1.7 v2(3115,2231.26) U1.7@3134.8,2231.26 ; U1.7@3131.3,2237.09 ccw(c3131.3,2259.61) 3147.23,2243.68 ; U2.7 3164.33,2260.79 U1.7@3134.8,2231.26 ; U1.7@3134.8,2231.26 cw(c3134.8,2249.2) 3121.51,2237.15 ccw(c3134.8,2249.2) U1.7@3134.8,2231.26 ; U1.7@3134.8,2231.26 ccw(c3134.8,2213.32) 3121.51,2225.37 cw(c3134.8,2213.32) U1.7@3134.8,2231.26
  Bottom Layer w15: 3145,2880 3145,2261.26 v2(3115,2231.26) 3123.11,2223.15 ccw(c3193.82,2293.86) 3193.82,2193.86 3310,2193.86 ccw(c3310,2232.92) 3337.62,2205.3 ccw(c3283.59,2259.33) 3360,2259.33 ; OSC1.3@3333.64,2305.7 cw(c3306.05,2259.33) 3360,2259.33 ; OSC1.3@3341.31,2318.59 cw(c3321.75,2285.71) 3360,2285.71 cw(c3398.25,2285.71) OSC1.3@3378.69,2318.59 ; OSC1.3 3360,2259.33 ; OSC1.3@3386.36,2305.7 ccw(c3413.95,2259.33) 3360,2259.33 ; 3125.72,2241.98 cw(c3115,2252.7) 3115,2237.54 ccw(c3115,2252.7) 3125.72,2241.98 ; 3125.72,2241.98 ccw(c3136.44,2231.26) 3121.28,2231.26 cw(c3136.44,2231.26) 3125.72,2241.98 ; v2@3121.07,2232.89 ccw(c3145.5,2239.43) 3132.85,2217.52 cw(c3145.5,2239.43) v2@3121.07,2232.89
  Bottom Layer w20: J3.7@3110.25,3015.25 cw(c3050.5,2955.5) 3135,2955.5 cw(c3219.5,2955.5) J3.7@3159.75,3015.25 ; J3.7 3135,2890 3145,2880
PB7: J3.6 U1.8 U2.8 | length 1313.1
  Top Layer w10: U1.8 3135.24,2199.76 U2.8 ; U1.8@3131.3,2205.59 ccw(c3131.3,2229.16) 3147.97,2212.49 ; 3161.01,2217.47 ccw(c3154.75,2240.84) v2@3176.08,2229.42 ; 3143.75,2208.27 cw(c3175,2177.02) 3175,2221.22 ccw(c3175,2177.02) 3143.75,2208.27 ; 3160.82,2225.35 cw(c3175,2211.16) 3175,2231.22 ccw(c3175,2211.16) 3160.82,2225.35
  Bottom Layer w25: v2@3176.99,2241.52 3185,2249.53 ; J3.6@3212.02,3017.02 cw(c3156.54,2961.54) 3235,2961.54 cw(c3313.46,2961.54) J3.6@3257.98,3017.02 ; J3.6 3235,2505 3185,2455 3185,2249.53 ; 3185,2249.53 cw(c3163.74,2249.53) 3174.36,2231.11 ccw(c3163.74,2249.53) 3185,2249.53 ; v2@3174.1,2230.9 ccw(c3147.77,2257.23) 3185,2257.23 cw(c3147.77,2257.23) v2@3174.1,2230.9 ; v2@3176.28,2230 cw(c3202.37,2230) 3183.92,2248.45 ccw(c3202.37,2230) v2@3176.28,2230
  other v2: 3175,2230
PO: J3.2 pad.0 Q1.5 Q1.6 Q1.7 Q1.8 Q2.5 Q2.6 Q2.7 Q2.8 | length 1137.4
  Top Layer w50: J3.2 3635,3029.19 pad.0 ; J3.2@3655,3040 ccw(c3729.37,3040) 3676.78,2987.41
  Bottom Layer w50: 3700,2637.31 cw(c3770.04,2637.31) Q2.6@3728.17,2693.45 ; 3700.58,2655 ccw(c3700.58,2718.36) 3745.38,2673.56 ; Q1.8@3716.81,2695.98 cw(c3730.88,2695.98) Q1.8@3720.93,2705.93 ; Q1.8@3720.05,2705.05 cw(c3730,2695.11) 3730,2709.17 ; Q2.6@3720.67,2659.1 ccw(c3730.57,2669) Q2.6@3730.57,2655 ; Q2.6@3726.73,2673.56 ccw(c3771.53,2718.36) Q2.7@3771.53,2655 ; Q2.6@3729.43,2655 ccw(c3729.43,2669) Q2.6@3739.33,2659.1 ; Q2.7@3770.67,2659.1 ccw(c3780.57,2669) Q2.7@3780.57,2655 ; Q2.7@3779.43,2655 ccw(c3779.43,2669) Q2.7@3789.33,2659.1 ; Q2.7@3789.33,2686.66 ccw(c3727.34,2748.64) Q1.6@3815,2748.64 ; pad.0 3800,2864.19 3800,2785 ; Q1.5@3815,2803.44 3815,2770 ; 3800,2785 3700,2685 3700,2655 3815,2655 3815,2770 ; 3800,2785 3815,2770
RST: J1.7 U1.29 U2.29 | length 1222
  Top Layer w10: U1.29@3255.13,2449.58 cw(c3242.24,2436.69) 3260.47,2436.69 ; U1.29@3259.25,2507.09 U1.29 3260.47,2474.13 3260.47,2434.53 3265.16,2429.84 U2.29 ; 3260.47,2442.58 cw(c3270.37,2442.58) U1.29@3263.37,2449.58
  Top Layer w15: U1.29@3261.77,2499.18 cw(c3267.79,2504.38) 3262.17,2510 3352.17,2600 ; U1.29@3262.58,2497.01 cw(c3294.94,2497.01) 3272.06,2519.89
  Top Layer w20: 3352.17,2600 3805,2600 3890,2685 3890,2760 ; 3910.86,2780.86 ccw(c3876.72,2815) J1.7@3925,2815 ; 3917.41,2787.41 cw(c3949.86,2754.96) J1.7@3957.5,2800.21 ; J1.7@3925.63,2808.37 cw(c3905.51,2804.49) 3920,2790 ; J1.7@3935.44,2790.06 ccw(c3927.75,2782.25) 3920,2790 ; J1.7@3954.17,2780.49 ccw(c3941.94,2708.07) 3890,2760 ; J1.7@3975,2790 3920,2790 ; 3890,2760 3920,2790
RXD: J2.1 LED1.2 U1.30 U2.30 | length 939.7
  Top Layer w10: U1.30 3227.76,2447.24 3245.47,2429.53 U2.30 ; U1.30@3233.58,2453.7 ccw(c3263.24,2453.7) 3242.27,2432.73
  Top Layer w15: 3030,2600 3080,2550 3227.76,2550
  Top Layer w20: J2.1@2920,2815 2985,2815 ; J2.1@2936.83,2792.52 cw(c2985,2752.15) 2985,2815 ; J2.1@2936.83,2837.48 ccw(c2985,2877.85) 2985,2815 ; 3030,2600 3030,2770 2985,2815 ; U1.30 3227.76,2550 3227.76,2552.76 LED1.2 ; 3250.86,2575.86 ccw(c3216.72,2610) LED1.2@3265,2610 ; LED1.2@3262.93,2587.93 cw(c3280,2570.86) LED1.2@3280,2595
SCK: J4.7 U1.17 U2.17 | length 655.5
  Top Layer w10: U2.17 3414.76,2199.76 U1.17 ; 3402.03,2212.49 ccw(c3418.7,2229.16) U1.17@3418.7,2205.59
  Top Layer w15: U1.17 3460.24,2199.76 3585,2075 3680,2075 ; U1.17@3465.33,2199.76 ccw(c3477.64,2199.76) 3468.94,2191.06
  Top Layer w20: J4.7@3701.07,1998.57 ccw(c3623.24,2018.24) 3680,2075 3735,2020 J4.7 ; 3704.91,2050.09 cw(c3663.01,2008.19) J4.7@3720.46,1993.67
TXD: J2.2 LED2.2 U1.31 U2.31 | length 1296.2
  Top Layer w10: U1.31@3196.26,2447.87 cw(c3196.26,2433.71) 3206.27,2443.73 ; U1.31 3196.26,2453.74 3225.79,2424.21 U2.31 ; U1.31@3202.09,2453.7 ccw(c3216.06,2453.7) 3206.18,2443.82 ; 3222.41,2427.59 cw(c3214.08,2419.25) U2.31@3225.87,2419.25
  Top Layer w15: J2.2@2910,2677.5 cw(c2910,2574.9) 2982.55,2647.45 ; J2.2@2910,2692.5 cw(c2910,2626.11) 2956.95,2673.05 ; J2.2@2932.03,2687.03 2942.97,2687.03 2985,2645 2985,2610 3070,2525 3185,2525 ; J2.2@2932.5,2715 ccw(c2974.75,2715) 2944.87,2685.13 ; J2.2@2947.5,2715 ccw(c3025.96,2715) 2970.48,2659.52 ; 3170.82,2521.42 ccw(c3184.32,2544.8) v2@3194.01,2519.6 ; 3185.65,2524.56 ccw(c3196.01,2534.1) v2@3196.18,2520.02 ; U1.31@3193.01,2497.72 ccw(c3164.03,2504.03) 3185,2525 ; v2(3196.26,2513.74) 3185,2525 ; 3185.54,2524.46 cw(c3174.82,2513.74) 3189.98,2513.74 ccw(c3174.82,2513.74) 3185.54,2524.46 ; 3185.54,2524.46 ccw(c3196.26,2535.18) 3196.26,2520.02 cw(c3196.26,2535.18) 3185.54,2524.46 ; 3153.92,2525 cw(c3153.92,2471.4) 3191.82,2509.3 ccw(c3153.92,2471.4) 3153.92,2525
  Bottom Layer w20: v3(3190,2825) 3196.26,2818.74 v2(3196.26,2513.74) ; v3@3179.39,2814.39 cw(c3138.67,2773.67) 3196.26,2773.67 ccw(c3138.67,2773.67) v3@3179.39,2814.39
VCC: C1.2 L1.1 L2.2 OSC1.4 pad.1@3595,2860 Q1.1 Q1.2 Q1.3 R1.2 R2.2 U1.4 U1.6 U2.4 U2.6 | length 4751.7
  Top Layer w10: U1.6 3142.76,2262.76 ; U1.4 3110.39,2325 3145,2325 ; U1.4@3128.84,2329.12 cw(c3134.77,2320.99) 3141.89,2328.11 ; U1.6@3131.26,2258.58 ccw(c3131.43,2275.85) 3143.64,2263.64 ; U1.6@3131.36,2268.58 ccw(c3131.76,2309.18) 3160.47,2280.47 ; U1.4@3134.73,2321.04 cw(c3141.75,2311.43) 3150.16,2319.84 ; U1.4@3135.42,2321.63 cw(c3143.56,2313.49) 3143.56,2325 ; U1.4@3135.85,2329.39 ccw(c3145,2336.73) 3145,2325 ; U1.6@3136.01,2259.32 cw(c3142.76,2254.41) 3142.76,2262.76 ; U1.6@3136.01,2266.19 ccw(c3142.76,2271.1) 3142.76,2262.76 ; 3156.88,2276.88 cw(c3165.75,2268.01) U2.6@3165.75,2280.55 ; U2.6 3160.47,2280.47 ; U2.4 3150.16,2319.84 ; 3142.76,2262.76 3160.47,2280.47 ; 3145,2325 3150.16,2319.84
  Top Layer w20: R1.2@3069.39,2735.61 ccw(c3043.79,2761.21) 3080,2761.21 ccw(c3116.21,2761.21) R1.2@3090.61,2735.61 ; v3(3070,2845) v3@3080,2835 ; 3073.42,2810.1 cw(c3088.17,2818.62) v3@3078.51,2832.65 ; R1.2 v3@3080,2835 ; U1.6 3052.24,2262.76 v3(3020,2295) 3050.75,2325.75 U1.4 ; 3152.32,2762.68 cw(c3109.64,2720) R2.2@3170,2720 ; R2.2@3195,2705 cw(c3195,2656.72) 3229.14,2690.86 ; R2.2@3210,2720 ccw(c3234.14,2720) R2.2@3217.07,2702.93 ; v3(3335,2665) 3255,2665 3200,2720 3195,2720 v3@3080,2835 ; v3@3035,2295 cw(c3071.21,2295) 3045.61,2320.61 ; v3@3035,2295 ccw(c3071.21,2295) 3045.61,2269.39 ; v3@3035,2295 ccw(c3071.21,2295) 3045.61,2269.39 ; v3@3035,2295 cw(c3071.21,2295) 3045.61,2320.61 ; 3045.61,2269.39 ccw(c3020,2243.79) 3020,2280 cw(c3020,2243.79) 3045.61,2269.39 ; 3045.61,2320.61 cw(c3020,2346.21) 3020,2310 ccw(c3020,2346.21) 3045.61,2320.61 ; 3095.61,2819.39 cw(c3121.21,2845) 3085,2845 ccw(c3121.21,2845) 3095.61,2819.39 ; 3095.61,2819.39 ccw(c3070,2793.79) 3070,2830 cw(c3070,2793.79) 3095.61,2819.39 ; 3298.79,2665 cw(c3298.79,2628.79) 3324.39,2654.39 ccw(c3298.79,2628.79) 3298.79,2665 ; 3298.79,2665 ccw(c3298.79,2701.21) 3324.39,2675.61 cw(c3298.79,2701.21) 3298.79,2665 ; v3@3059.39,2834.39 cw(c3009.64,2784.64) 3080,2784.64 ccw(c3009.64,2784.64) v3@3059.39,2834.39
  Top Layer w50: v3(3070,2845) 3160,2935 3529.7,2935 3595,2869.7 3595,2860 3555,2820 C1.2 cw(c3420,2728.52) L1.1@3489.19,2788.37
  Bottom Layer w20: v3(3020,2295) 3020,2145 3110,2055 3680,2055 3765,2140 v2(3765,2185) v2(3765,2240) ; OSC1.4@3325.31,2599.69 ccw(c3301.93,2623.07) OSC1.4@3335,2623.07 ; v3@3329.91,2650.89 cw(c3323.11,2632.08) 3342.43,2637.26 cw(c3361.75,2642.43) v3@3346.47,2655.33 ; 3335,2637.99 ccw(c3382.25,2637.99) OSC1.4@3368.47,2592.79 ; OSC1.4@3350,2580 3335,2595 v3(3335,2665) ccw(c3390.49,2665) OSC1.4@3374.31,2611.92 ; 3020,2258.79 cw(c3056.21,2258.79) 3030.61,2284.39 ccw(c3056.21,2258.79) 3020,2258.79 ; 3020,2258.79 ccw(c2983.79,2258.79) 3009.39,2284.39 cw(c2983.79,2258.79) 3020,2258.79 ; 3335,2628.79 cw(c3371.21,2628.79) 3345.61,2654.39 ccw(c3371.21,2628.79) 3335,2628.79 ; 3335,2628.79 ccw(c3298.79,2628.79) 3324.39,2654.39 cw(c3298.79,2628.79) 3335,2628.79
  Bottom Layer w50: v3(3020,2295) 3020,2790 ; 3020,2795 v3(3070,2845) ; Q1.1 pad.1@3581.56,2841.56
  Bottom Layer w80: pad.1@3597.5,2857.5 3635,2895
VIN: J3.3 L1.2 | length 540.4
  Top Layer w50: J3.3 3535,3031.09 L1.2@3811.09,2755 ; J3.3@3555,3040 ccw(c3624.79,3040) 3575.44,2990.65 ; 3744.89,2821.2 ccw(c3822.5,2898.82) L1.2@3822.5,2789.06
pads on no net: OSC1.1

## Polygon pours and split planes (outlines as drawn)
no net on Bottom Solder "Top Layer-No Net" (solid): 3840,2625 3670,2625 3670,2695 3815,2840 3840,2815 3840,2640
no net on Bottom Solder "Top Layer-No Net" (solid): 3680,2890 3605,2815 3600,2815 3550,2865 3630,2945
GND on Bottom Layer "Keep-Out Layer-No Net" (solid, pour order 8): 2825,3125 2825,1905 4045,1905 4045,3125

## Keep-outs
Keep-Out Layer:
  lines w10: 2830,2100 2830,2805 2830,2945 ; 2830,2110 ccw(c3030,2110) 3030,1910 ; 2830,2920 cw(c3030,2920) 3030,3120 ; 3010,3120 3860,3120 ; 3025,1910 3850,1910 ; 3840,1910 ccw(c3840,2110) 4040,2110 ; 3840,3120 cw(c3840,2920) 4040,2920 ; 4040,2090 4040,2945

## Other copper
Top Layer:
  text "MAGI" at 2905,2960 h39.37
Bottom Layer:
  rectangle net GND: 3331.22,2275 3335,2285
  rectangle net GND: 3320,2239.41 3343.81,2275
  rectangle net GND: 3295,2241.1 3331.22,2285
  rectangle net GND: 3205,2241.1 3295.94,2414.06
  rectangle net PO: 3730,2668.43 3800,2740
  rectangle net GND: 3375,2657.17 3480,2715
  rectangle net GND: 3360.27,2681.34 3385,2705
  rectangle net GND: 3365,2665 3385,2685
  text "MAGI" at 3950,2000 h31.5

## Silkscreen, mask and mechanical layers (free items; w line width, h text height)
Top Overlay:
  circle w13: c3847.93,2930 r7.07
  lines w11.81: 3315,2675 3315,2765 ; 3320,2565 3320,2655
Top Solder:
  lines w10: 3130,2294.25 3144.25,2294.25 3150.16,2300.16 3176.57,2300.16 ; 3134.8,2231.26 3164.33,2260.79 ; 3135.24,2199.76 3170,2234.53 ; 3135.24,2420.24 3176.57,2378.9 ; 3137.2,2385 3162.99,2359.21 3176.57,2359.21 ; 3142.76,2262.76 3160.47,2280.47 3170,2280.47 ; 3142.76,2357.24 3160.47,2339.53 3176.57,2339.53 ; 3145,2325 3150.16,2319.84 3176.57,2319.84 ; 3164.76,2170.24 3206.1,2211.58 ; 3164.76,2449.76 3206.1,2408.43 ; 3196.26,2167.47 3225.79,2197 ; 3200,2450 3225.79,2424.21 ; 3209.84,2300.16 3210,2300 ; 3227.76,2177.76 3245.47,2195.47 3245.47,2211.58 ; 3227.76,2447.24 3245.47,2429.53 3245.47,2425 ; 3260,2180 3265.16,2185.16 3265.16,2205 ; 3260.47,2445 3260.47,2434.53 3265.16,2429.84 ; 3284.84,2420 3284.84,2428.86 3290,2434.02 3290,2450 ; 3285,2200 3285,2185 3290.75,2179.25 3290.75,2172.95 ; 3304.53,2211.58 3304.53,2195.47 3325,2175 3325,2172.2 ; 3305,2419.45 3305,2430 3322.24,2447.24 ; 3324.21,2197 3345,2176.21 ; 3324.21,2423.23 3353.74,2452.76 ; 3343.9,2206.1 3346.1,2206.1 3380,2172.2 ; 3343.9,2408.43 3385.24,2449.76 ; 3373.43,2378.9 3409.53,2415 3412.8,2415 ; 3380,2300.16 3394.84,2300.16 3400,2295 3410,2295 ; 3385,2320 3395,2320 3400,2325 3425,2325 ; 3385.67,2359.21 3411.46,2385 ; 3386.46,2260 3415.2,2231.26 ; 3389.53,2339.53 3407.24,2357.24 ; 3390,2280 3407.24,2262.76 3440.35,2262.76 ; 3627.03,2902.97 3635,2895
  lines w12: 3346.1,2206.1 3385.24,2166.97 3385.24,2164.76 ; 3373.43,2241.1 3414.76,2199.76 3425,2199.76
  lines w50: 3535,3040 3535,3031.09 3765,2801.09 ; 3545,2810 3575,2840 3575,2860 ; 3635,3040 3635,3029.19 3794.19,2870
Bottom Solder:
  lines w50: 3735,3040 3875,2900 3875,2485 ; 3800,2785 3800,2870
  lines w70: 3740,2470 3860,2470 3875,2485
Mechanical 1:
  lines w10: 2830,2100 2830,2805 2830,2945 ; 2830,2110 ccw(c3030,2110) 3030,1910 ; 2830,2920 cw(c3030,2920) 3030,3120 ; 3010,1910 3850,1910 ; 3010,3120 3860,3120 ; 3840,1910 ccw(c3840,2110) 4040,2110 ; 3840,3120 cw(c3840,2920) 4040,2920 ; 4040,2090 4040,2945